# EAGLE board Brain_oneside (EAGLE 5.11)
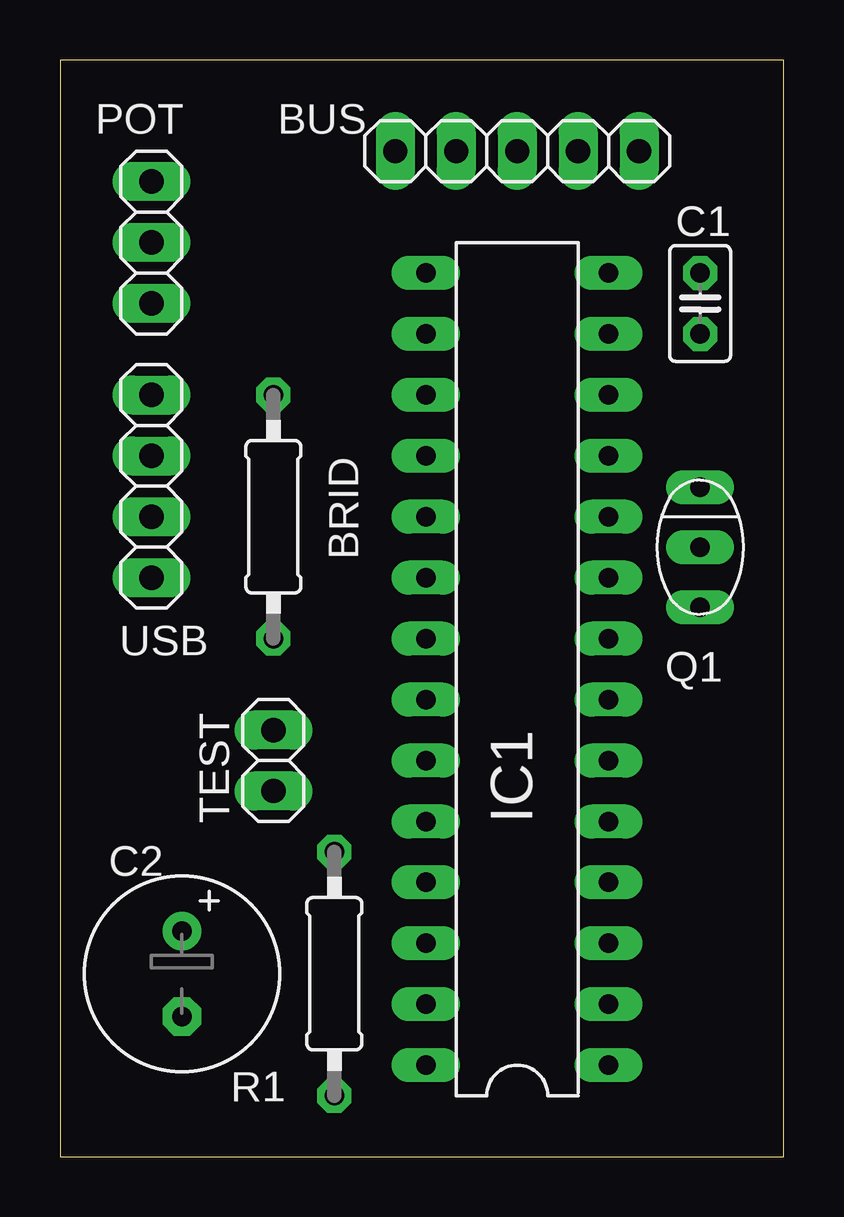
[diagram p0: board, top side]
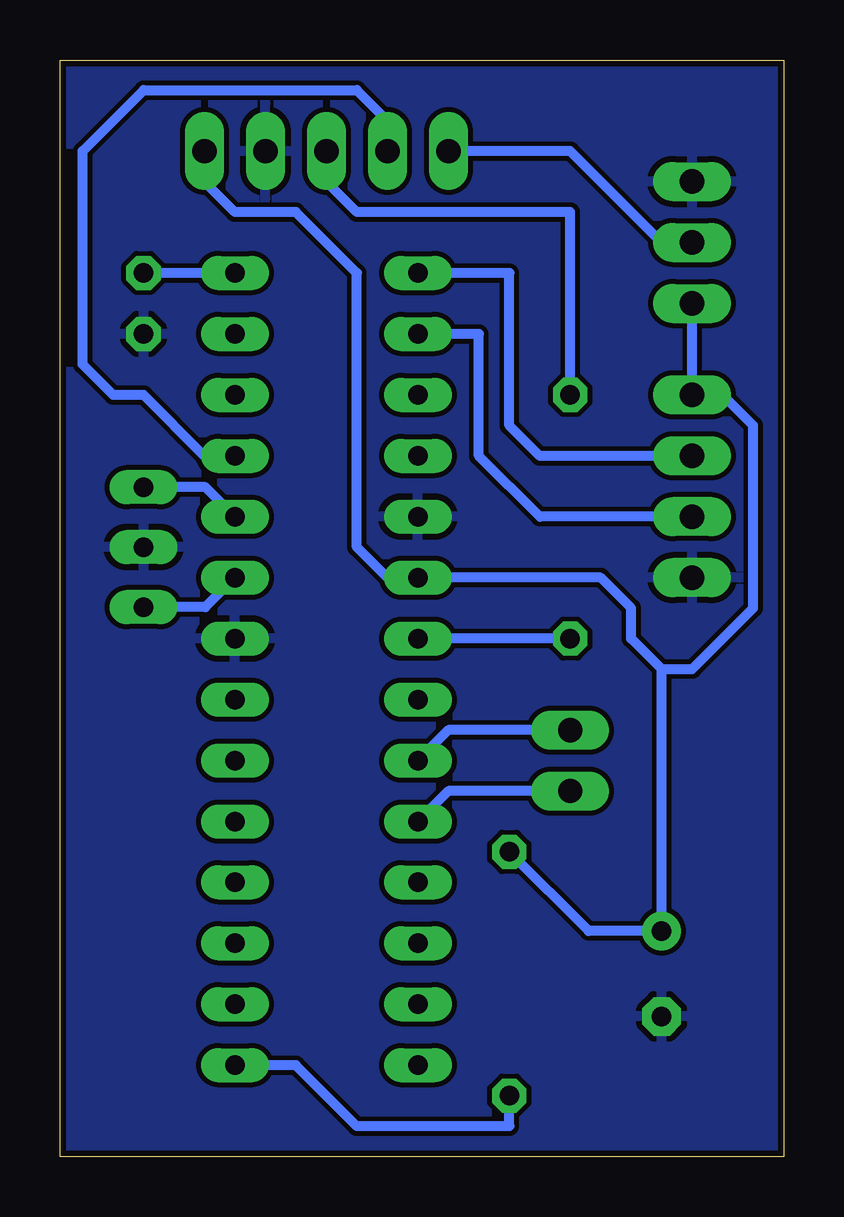
[diagram p1: board, bottom side, seen from below]

Size 30.15 x 45.71 mm. Coordinates in mm from the lower left corner, seen from the top.
Outline: 0,0 30.15,0 30.15,45.71 0,45.71 0,0
Copper layers (1*16): Top 0.035mm / dielectric 1.5mm / Bottom 0.035mm
Design rules "SparkFun": minimum track width 8mil, minimum drill 20mil, track to track 8mil, track to pad 8mil, pad to pad 8mil, via to via 8mil, smd to smd 8mil, copper to edge 10mil, drill to drill 8mil, minimum pad ring 12mil, minimum via ring 10mil, stop-mask expansion 4mil, vias tented up to drill 25mil, thermal gap 10mil

## Footprints (pad centres in the part's own frame; a part is rotated, then mirrored left to right if it is on the bottom)
0207/10 = drill 0.813 octagon: 1 -5.08,0; 2 5.08,0
1X05 = drill 1.016 long: 1 -5.08,0; 2 -2.54,0; 3 0,0; 4 2.54,0; 5 5.08,0
C025-025X050 = drill 0.813 octagon: 1 -1.27,0; 2 1.27,0
E3,5-8 = drill 0.813 pad 1.6 round: + -1.778,0 | drill 0.813 pad 1.6 octagon: - 1.778,0
DIL28-3 = drill 0.813 long: 1 -16.51,-3.81; 2 -13.97,-3.81; 3 -11.43,-3.81; 4 -8.89,-3.81; 5 -6.35,-3.81; 6 -3.81,-3.81; 7 -1.27,-3.81; 8 1.27,-3.81; 9 3.81,-3.81; 10 6.35,-3.81; 11 8.89,-3.81; 12 11.43,-3.81; 13 13.97,-3.81; 14 16.51,-3.81; 15 16.51,3.81; 16 13.97,3.81; 17 11.43,3.81; 18 8.89,3.81; 19 6.35,3.81; 20 3.81,3.81; 21 1.27,3.81; 22 -1.27,3.81; 23 -3.81,3.81; 24 -6.35,3.81; 25 -8.89,3.81; 26 -11.43,3.81; 27 -13.97,3.81; 28 -16.51,3.81
1X03 = drill 1.016 long: 1 -2.54,0; 2 0,0; 3 2.54,0
CSTLS_X = drill 0.813 long: 1 -2.5,0; 2 0,0; 3 2.5,0
1X02 = drill 1.016 long: 1 -1.27,0; 2 1.27,0
1X04 = drill 1.016 long: 1 -3.81,0; 2 -1.27,0; 3 1.27,0; 4 3.81,0

## Placement (x,y rotation side)
BRID  [0207/10]  8.89,26.67 90 top
BUS  [1X05]  19.05,41.91 180 top
C1  [C025-025X050]  26.67,35.56 270 top
C2  [E3,5-8]  5.08,7.62 270 top
IC1  PIC18F2550_28DIP  [DIL28-3]  19.05,20.32 90 top
POT  [1X03]  3.81,38.1 90 top
Q1  [CSTLS_X]  26.67,25.4 270 top
R1  [0207/10]  11.43,7.62 90 top
TEST  [1X02]  8.89,16.51 90 top
USB  [1X04]  3.81,27.94 270 top

## Library data of the parts
BRID C1 C2 R1 = rcl
BUS POT TEST USB = pinhead
IC1 = microchip; MF: MICROCHIP; MPN: PIC18F2550-I/SP; OC_FARNELL: 1523822; OC_NEWARK: 80K6054
Q1 = murata-resonators

## Nets
+5V: BUS.1 C2.+ IC1.20 POT.1 R1.2 USB.1
CLK: BRID.2 BUS.3
CLKI: IC1.9 Q1.3
CLKO: IC1.10 Q1.1
D+: IC1.16 USB.3
D-: IC1.15 USB.2
GND: BUS.2 C1.2 C2.- IC1.8 IC1.19 POT.3 Q1.2 USB.4
LED0: IC1.23 TEST.2
LED1: IC1.24 TEST.1
N$1: C1.1 IC1.14
N$2: IC1.1 R1.1
N$4: BRID.1 IC1.21
NOTE_PIN: BUS.4 IC1.11
THRESH: BUS.5 POT.2
TX: IC1.17

## Tracks (layer width: path | path; a pad name or v marks a point on that pad's centre or on a via)
+5V
  Bottom 0.406: R1.2 8.13,9.4 C2.+ 5.08,20.32 | BUS.1 24.13,40.64 22.86,39.37 20.32,39.37 17.78,36.83 17.78,25.4 16.51,24.13 IC1.20 7.62,24.13 6.35,22.86 6.35,21.59 5.08,20.32 | POT.1 USB.1 2.54,31.75 1.27,30.48 1.27,22.86 3.81,20.32 5.08,20.32
CLK
  Bottom 0.406: BRID.2 8.89,39.37 17.78,39.37 19.05,40.64 BUS.3
CLKI
  Bottom 0.406: Q1.3 24.09,22.9 IC1.9
CLKO
  Bottom 0.406: Q1.1 24.09,27.9 IC1.10
D+
  Bottom 0.406: USB.3 10.16,26.67 12.7,29.21 12.7,34.29 IC1.16
D-
  Bottom 0.406: USB.2 10.16,29.21 11.43,30.48 11.43,36.83 IC1.15
GND
  pour Bottom: 0,45.72 30.48,45.72 30.48,0 0,0
LED0
  Bottom 0.406: TEST.2 13.97,17.78 IC1.23
LED1
  Bottom 0.406: TEST.1 13.97,15.24 IC1.24
N$1
  Bottom 0.406: IC1.14 C1.1
N$2
  Bottom 0.406: R1.1 11.43,1.27 17.78,1.27 20.32,3.81 IC1.1
N$4
  Bottom 0.406: BRID.1 IC1.21
NOTE_PIN
  Bottom 0.406: BUS.4 16.51,43.18 17.78,44.45 26.67,44.45 29.21,41.91 29.21,33.02 27.94,31.75 26.67,31.75 24.13,29.21 IC1.11
THRESH
  Bottom 0.406: POT.2 5.08,38.1 8.89,41.91 BUS.5